# Altium PCB Siwa_PCB.PcbDoc (part 1 of 2)
Units mm, origin at the board's own origin, x right, y up, seen from the top; angles counter-clockwise.
Board outline 100 x 100 mm, 2 copper layers (Top Layer, Bottom Layer), stack 1.569 mm thick; 68 components, 95 nets, 317 pads, 64 vias.
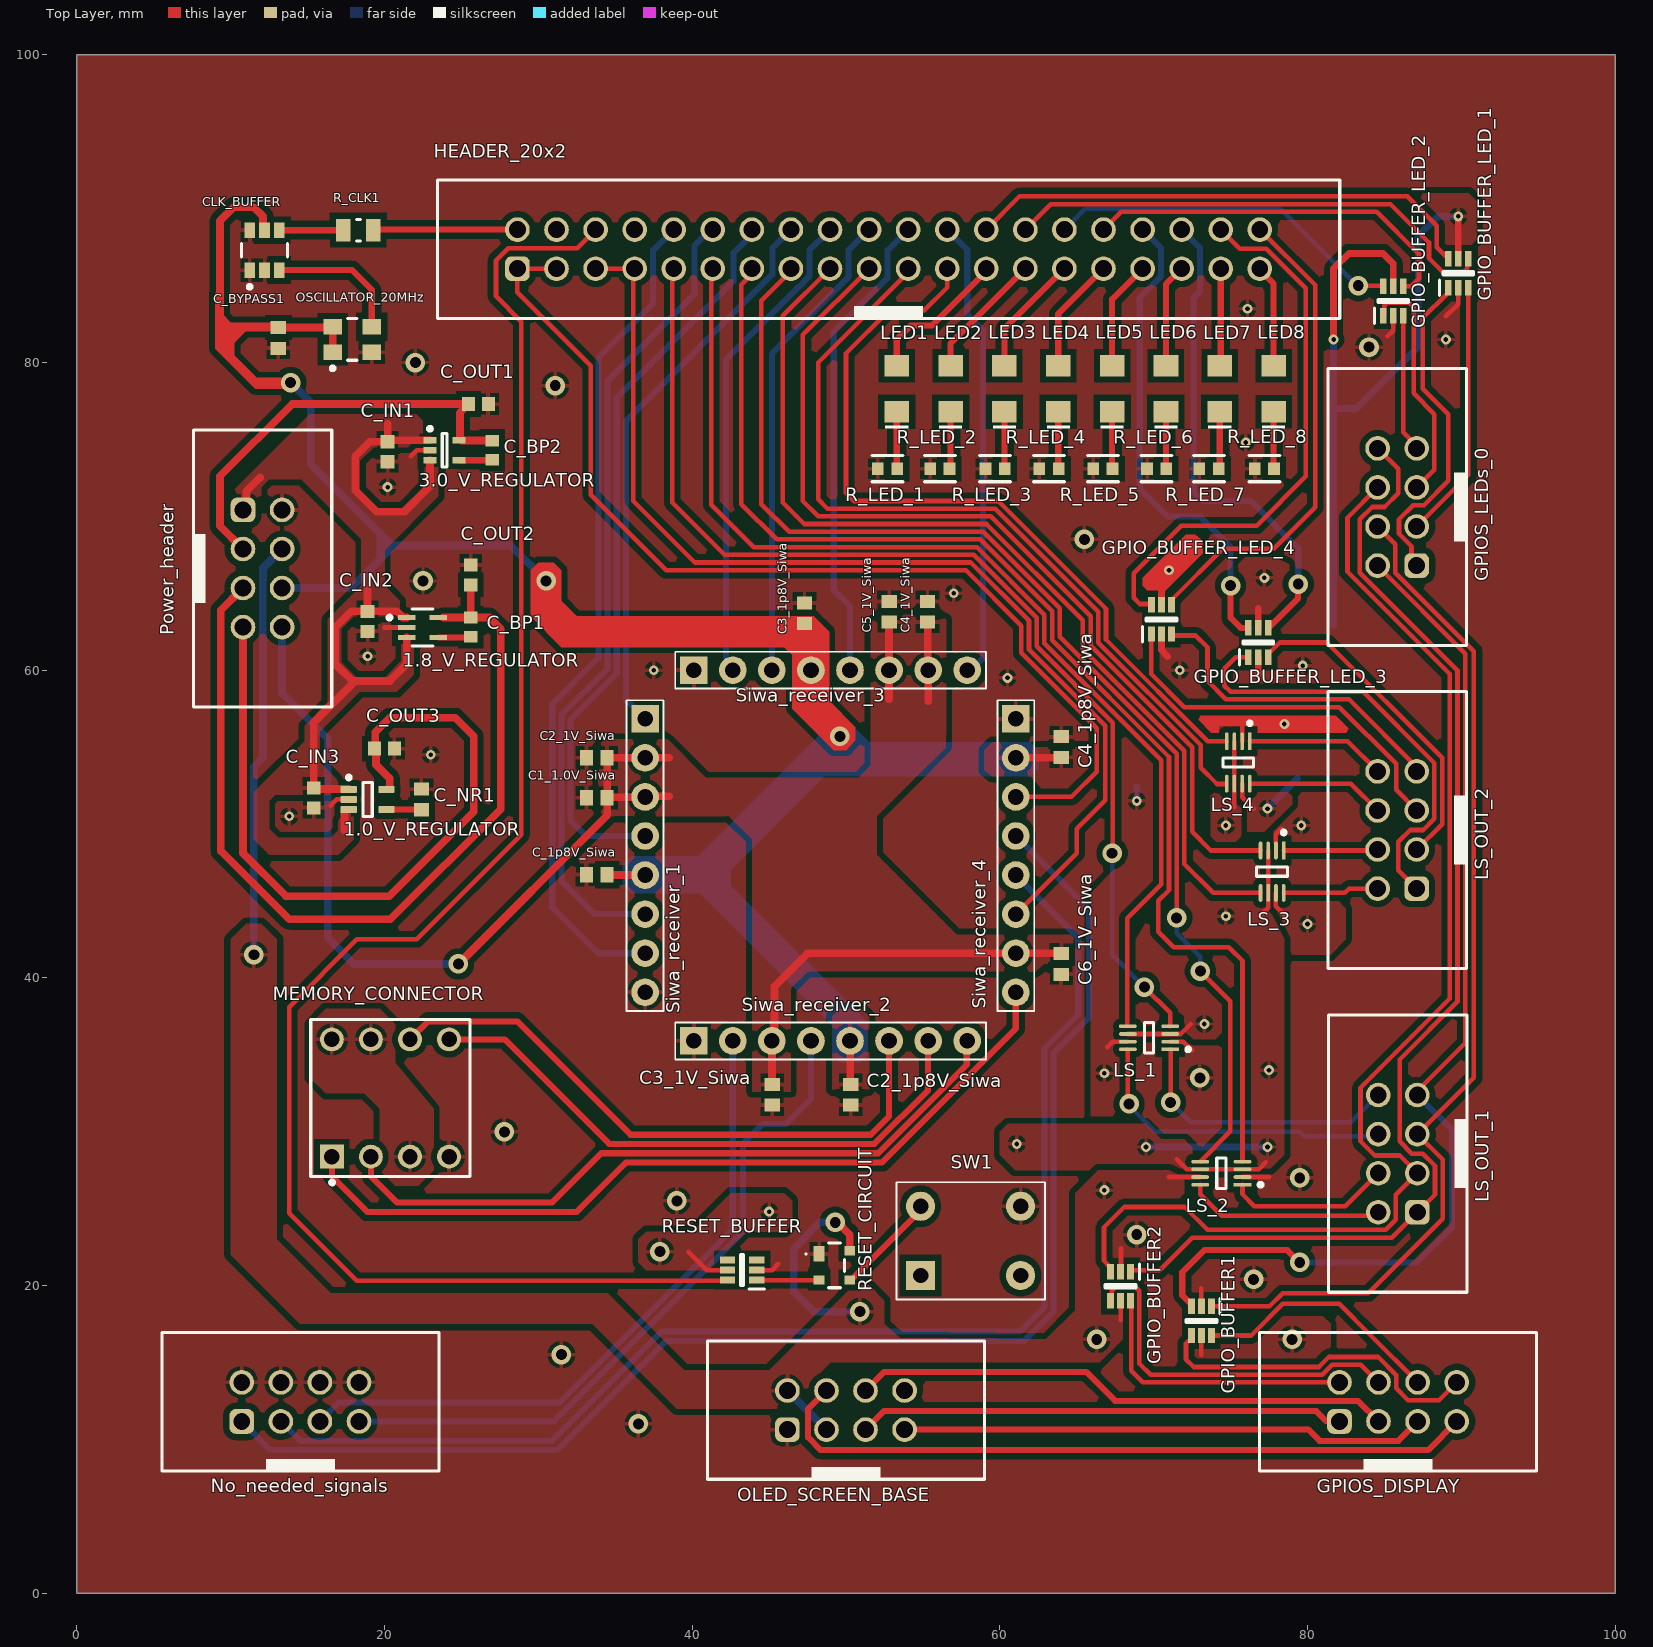
[diagram p0: Top Layer view]
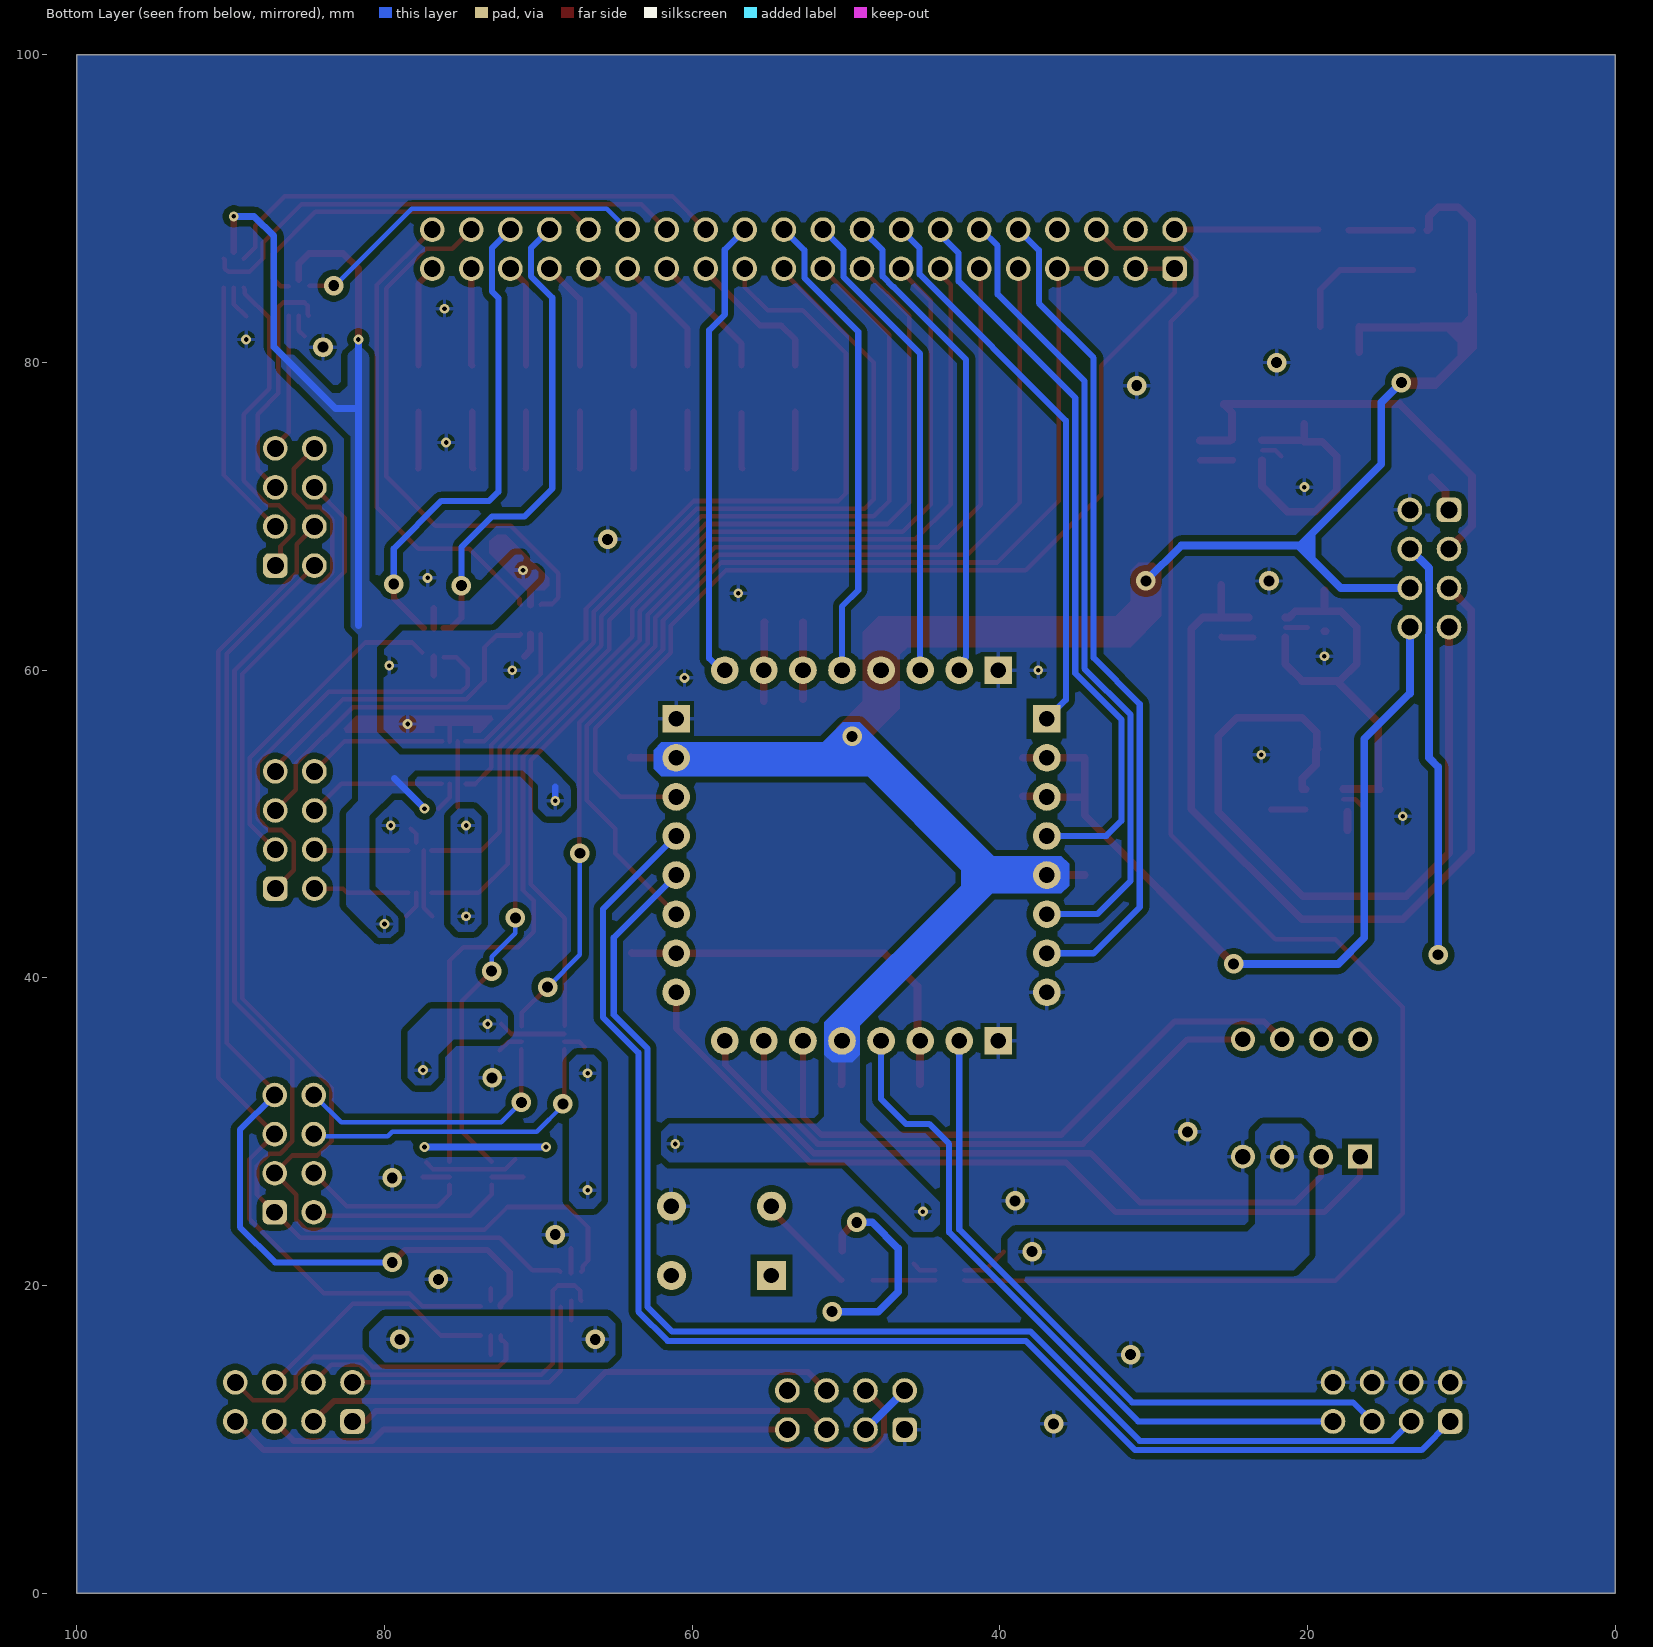
[diagram p1: Bottom Layer view, seen from below]
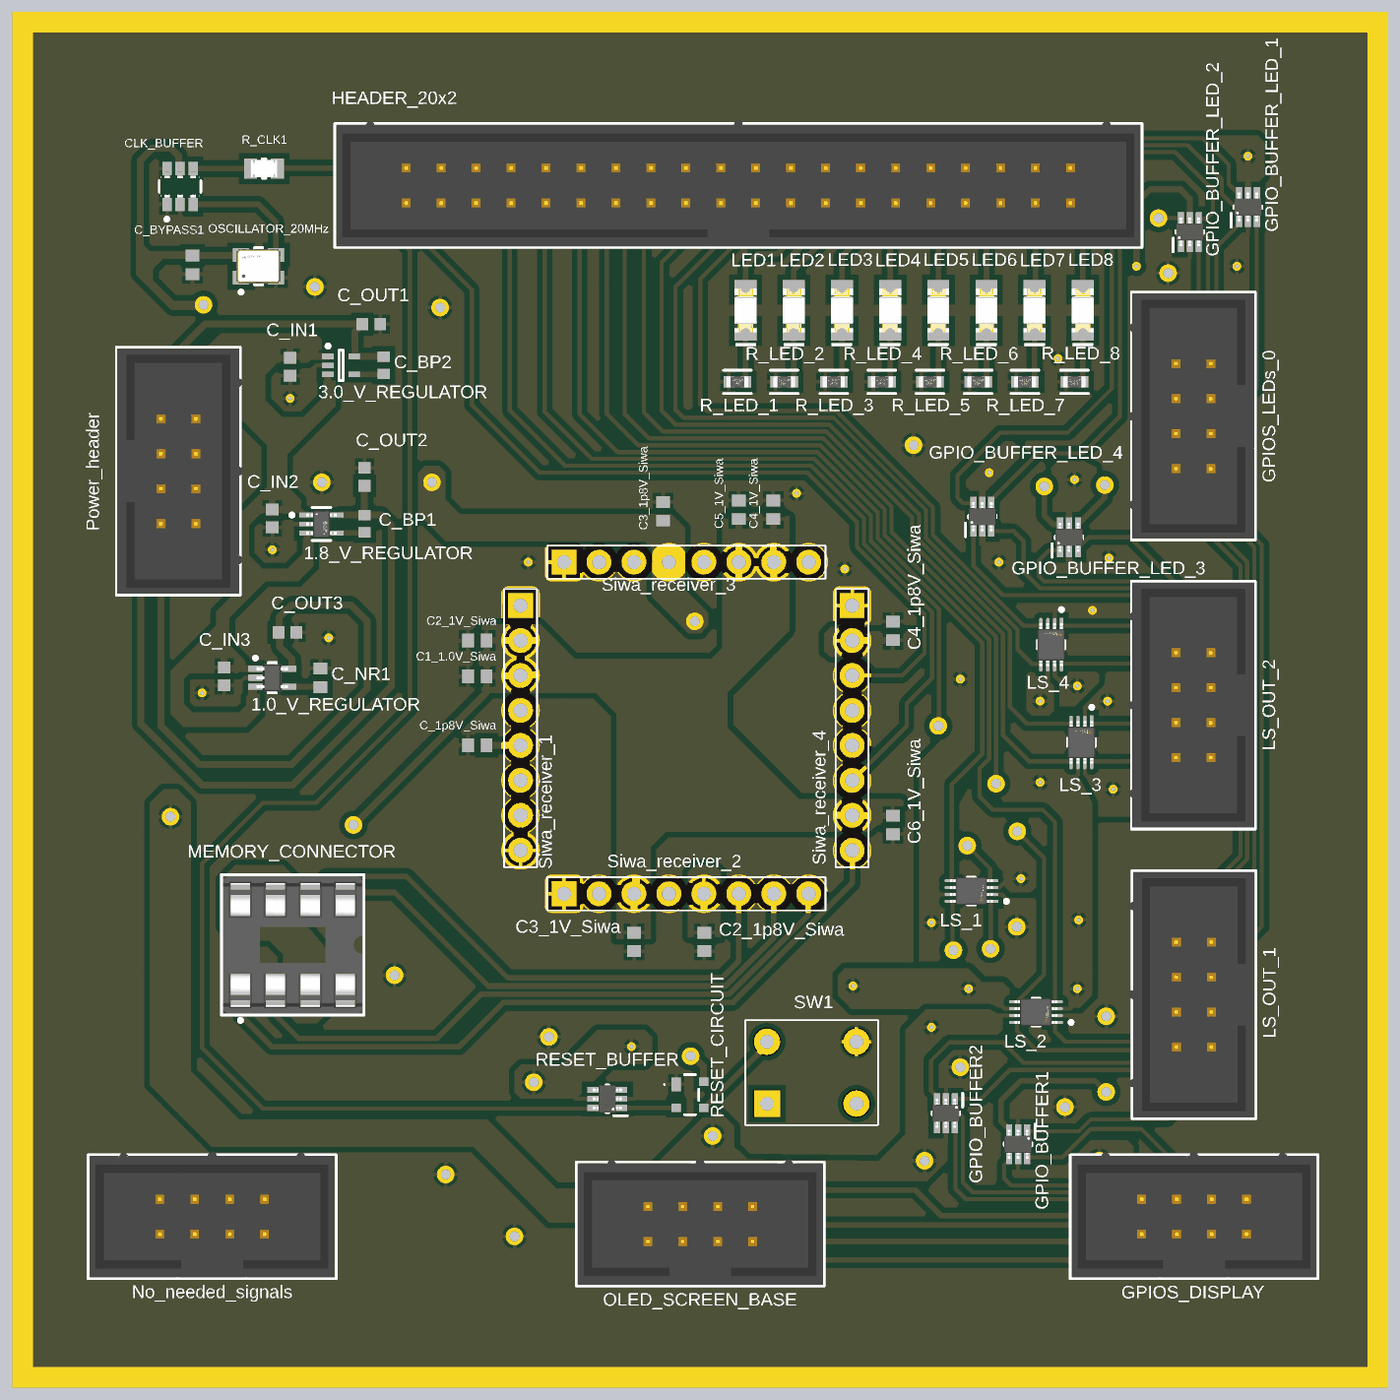
[diagram p3: 3D render of the assembled board from above, using the file's embedded part models]

## Layer stack, top to bottom
Top Solder: solder mask 0.0254, SM-001, Dk 4
Top Layer: signal copper 0.035
Dielectric 1: core 1.4986, Core-043, Dk 4.3
Bottom Layer: signal copper 0.035
Bottom Solder: solder mask 0.0254, SM-001, Dk 4

## Board outline
0,0 100,0 100,100 0,100

## Design rules (kind name [scope] priority, off if disabled: settings)
AssemblyTestPointUsage [All] p1: isadvanced=TRUE
AssemblyTestpoint [All] p1: isadvanced=TRUE testpointundercomponent=TRUE minsize=1.016 maxsize=2.54 preferedsize=1.524 minholesize=0 maxholesize=1.016 preferedholesize=0.813 testpointgrid=0.025 usegrid=TRUE gridtolerance=0 allowsidetop=TRUE allowsidebottom=TRUE
Clearance Clearance_1 [InNetClass('Power') And OnMid vs OnMid] p1: gap=0.4 ignorepadtopadclearanceinfootprint=TRUE except(0.2: Arc-SMDPad Arc-THPad Track-SMDPad Track-THPad SMDPad-SMDPad SMDPad-THPad SMDPad-Text THPad-THPad THPad-Text) sourcerule=100 cellrowname=Power cellrowtype=2 cellcolname=All cellcoltype=0 innerlayers=TRUE
Clearance Clearance_2 [InNetClass('Power') And (ExistsOnLayer('Top Layer') Or ExistsOnLayer('Bottom Layer')) vs (ExistsOnLayer('Top Layer') Or ExistsOnLayer('Bottom Layer'))] p2: gap=0.4 ignorepadtopadclearanceinfootprint=TRUE except(0.2: Arc-SMDPad Arc-THPad Track-SMDPad Track-THPad SMDPad-SMDPad SMDPad-THPad SMDPad-Text THPad-THPad THPad-Text) sourcerule=100 cellrowname=Power cellrowtype=2 cellcolname=All cellcoltype=0 outerlayers=TRUE
Clearance Clearance_3 [InNetClass('Power')] p3: gap=0.254 ignorepadtopadclearanceinfootprint=TRUE sourcerule=100 cellrowname=Power cellrowtype=2 cellcolname=All cellcoltype=0
Clearance Clearance_1 [OnMid vs InNet('1.8V') And OnMid] p4: gap=0.4 ignorepadtopadclearanceinfootprint=TRUE except(0.2: Arc-SMDPad Arc-THPad Track-SMDPad Track-THPad SMDPad-SMDPad SMDPad-THPad SMDPad-Text THPad-THPad THPad-Text) sourcerule=100 cellrowname=All cellrowtype=0 cellcolname=1.8V cellcoltype=1 innerlayers=TRUE
Clearance Clearance_2 [(ExistsOnLayer('Top Layer') Or ExistsOnLayer('Bottom Layer')) vs InNet('1.8V') And (ExistsOnLayer('Top Layer') Or ExistsOnLayer('Bottom Layer'))] p5: gap=0.4 ignorepadtopadclearanceinfootprint=TRUE except(0.2: Arc-SMDPad Arc-THPad Track-SMDPad Track-THPad SMDPad-SMDPad SMDPad-THPad SMDPad-Text THPad-THPad THPad-Text) sourcerule=100 cellrowname=All cellrowtype=0 cellcolname=1.8V cellcoltype=1 outerlayers=TRUE
Clearance Clearance_3 [ vs InNet('1.8V')] p6: gap=0.254 ignorepadtopadclearanceinfootprint=TRUE sourcerule=100 cellrowname=All cellrowtype=0 cellcolname=1.8V cellcoltype=1
Clearance Clearance_1 [OnMid vs InNet('1.8V_regulator') And OnMid] p7: gap=0.4 ignorepadtopadclearanceinfootprint=TRUE sourcerule=100 cellrowname=All cellrowtype=0 cellcolname=1.8V_regulator cellcoltype=1 innerlayers=TRUE
Clearance Clearance_2 [(ExistsOnLayer('Top Layer') Or ExistsOnLayer('Bottom Layer')) vs InNet('1.8V_regulator') And (ExistsOnLayer('Top Layer') Or ExistsOnLayer('Bottom Layer'))] p8: gap=0.4 ignorepadtopadclearanceinfootprint=TRUE sourcerule=100 cellrowname=All cellrowtype=0 cellcolname=1.8V_regulator cellcoltype=1 outerlayers=TRUE
Clearance Clearance_3 [ vs InNet('1.8V_regulator')] p9: gap=0.254 ignorepadtopadclearanceinfootprint=TRUE sourcerule=100 cellrowname=All cellrowtype=0 cellcolname=1.8V_regulator cellcoltype=1
Clearance Clearance_1 [OnMid vs InNet('1V') And OnMid] p10: gap=0.4 ignorepadtopadclearanceinfootprint=TRUE except(0.2: Arc-SMDPad Arc-THPad Track-SMDPad Track-THPad SMDPad-SMDPad SMDPad-THPad SMDPad-Text THPad-THPad THPad-Text) sourcerule=100 cellrowname=All cellrowtype=0 cellcolname=1V cellcoltype=1 innerlayers=TRUE
Clearance Clearance_2 [(ExistsOnLayer('Top Layer') Or ExistsOnLayer('Bottom Layer')) vs InNet('1V') And (ExistsOnLayer('Top Layer') Or ExistsOnLayer('Bottom Layer'))] p11: gap=0.4 ignorepadtopadclearanceinfootprint=TRUE except(0.2: Arc-SMDPad Arc-THPad Track-SMDPad Track-THPad SMDPad-SMDPad SMDPad-THPad SMDPad-Text THPad-THPad THPad-Text) sourcerule=100 cellrowname=All cellrowtype=0 cellcolname=1V cellcoltype=1 outerlayers=TRUE
Clearance Clearance_3 [ vs InNet('1V')] p12: gap=0.254 ignorepadtopadclearanceinfootprint=TRUE sourcerule=100 cellrowname=All cellrowtype=0 cellcolname=1V cellcoltype=1
Clearance Clearance_1 [OnMid vs InNet('1V_regulator') And OnMid] p13: gap=0.4 ignorepadtopadclearanceinfootprint=TRUE except(0.2: Arc-SMDPad Arc-THPad Track-SMDPad Track-THPad SMDPad-SMDPad SMDPad-THPad SMDPad-Text THPad-THPad THPad-Text) sourcerule=100 cellrowname=All cellrowtype=0 cellcolname=1V_regulator cellcoltype=1 innerlayers=TRUE
Clearance Clearance_2 [(ExistsOnLayer('Top Layer') Or ExistsOnLayer('Bottom Layer')) vs InNet('1V_regulator') And (ExistsOnLayer('Top Layer') Or ExistsOnLayer('Bottom Layer'))] p14: gap=0.4 ignorepadtopadclearanceinfootprint=TRUE except(0.2: Arc-SMDPad Arc-THPad Track-SMDPad Track-THPad SMDPad-SMDPad SMDPad-THPad SMDPad-Text THPad-THPad THPad-Text) sourcerule=100 cellrowname=All cellrowtype=0 cellcolname=1V_regulator cellcoltype=1 outerlayers=TRUE
Clearance Clearance_3 [ vs InNet('1V_regulator')] p15: gap=0.254 ignorepadtopadclearanceinfootprint=TRUE sourcerule=100 cellrowname=All cellrowtype=0 cellcolname=1V_regulator cellcoltype=1
Clearance Clearance_1 [OnMid vs InNet('3V') And OnMid] p16: gap=0.4 ignorepadtopadclearanceinfootprint=TRUE except(0.2: Arc-SMDPad Arc-THPad Track-SMDPad Track-THPad SMDPad-SMDPad SMDPad-THPad SMDPad-Text THPad-THPad THPad-Text) sourcerule=100 cellrowname=All cellrowtype=0 cellcolname=3V cellcoltype=1 innerlayers=TRUE
Clearance Clearance_2 [(ExistsOnLayer('Top Layer') Or ExistsOnLayer('Bottom Layer')) vs InNet('3V') And (ExistsOnLayer('Top Layer') Or ExistsOnLayer('Bottom Layer'))] p17: gap=0.4 ignorepadtopadclearanceinfootprint=TRUE except(0.2: Arc-SMDPad Arc-THPad Track-SMDPad Track-THPad SMDPad-SMDPad SMDPad-THPad SMDPad-Text THPad-THPad THPad-Text) sourcerule=100 cellrowname=All cellrowtype=0 cellcolname=3V cellcoltype=1 outerlayers=TRUE
Clearance Clearance_3 [ vs InNet('3V')] p18: gap=0.254 ignorepadtopadclearanceinfootprint=TRUE sourcerule=100 cellrowname=All cellrowtype=0 cellcolname=3V cellcoltype=1
Clearance Clearance_1 [OnMid vs InNet('3V_regulator') And OnMid] p19: gap=0.4 ignorepadtopadclearanceinfootprint=TRUE sourcerule=100 cellrowname=All cellrowtype=0 cellcolname=3V_regulator cellcoltype=1 innerlayers=TRUE
Clearance Clearance_2 [(ExistsOnLayer('Top Layer') Or ExistsOnLayer('Bottom Layer')) vs InNet('3V_regulator') And (ExistsOnLayer('Top Layer') Or ExistsOnLayer('Bottom Layer'))] p20: gap=0.4 ignorepadtopadclearanceinfootprint=TRUE sourcerule=100 cellrowname=All cellrowtype=0 cellcolname=3V_regulator cellcoltype=1 outerlayers=TRUE
Clearance Clearance_3 [ vs InNet('3V_regulator')] p21: gap=0.254 ignorepadtopadclearanceinfootprint=TRUE sourcerule=100 cellrowname=All cellrowtype=0 cellcolname=3V_regulator cellcoltype=1
Clearance Clearance_1 [OnMid vs InNet('5V_input') And OnMid] p22: gap=0.4 ignorepadtopadclearanceinfootprint=TRUE except(0.2: Arc-SMDPad Arc-THPad Track-SMDPad Track-THPad SMDPad-SMDPad SMDPad-THPad SMDPad-Text THPad-THPad THPad-Text) sourcerule=100 cellrowname=All cellrowtype=0 cellcolname=5V_input cellcoltype=1 innerlayers=TRUE
Clearance Clearance_2 [(ExistsOnLayer('Top Layer') Or ExistsOnLayer('Bottom Layer')) vs InNet('5V_input') And (ExistsOnLayer('Top Layer') Or ExistsOnLayer('Bottom Layer'))] p23: gap=0.4 ignorepadtopadclearanceinfootprint=TRUE except(0.2: Arc-SMDPad Arc-THPad Track-SMDPad Track-THPad SMDPad-SMDPad SMDPad-THPad SMDPad-Text THPad-THPad THPad-Text) sourcerule=100 cellrowname=All cellrowtype=0 cellcolname=5V_input cellcoltype=1 outerlayers=TRUE
Clearance Clearance_3 [ vs InNet('5V_input')] p24: gap=0.254 ignorepadtopadclearanceinfootprint=TRUE sourcerule=100 cellrowname=All cellrowtype=0 cellcolname=5V_input cellcoltype=1
Clearance Clearance_1 [InNet('GND') And OnMid vs OnMid] p25: gap=0.4 ignorepadtopadclearanceinfootprint=TRUE except(0.2: Arc-SMDPad Arc-THPad Track-SMDPad Track-THPad SMDPad-SMDPad SMDPad-THPad SMDPad-Text THPad-THPad THPad-Text) sourcerule=100 cellrowname=GND cellrowtype=1 cellcolname=All cellcoltype=0 innerlayers=TRUE
Clearance Clearance_2 [InNet('GND') And (ExistsOnLayer('Top Layer') Or ExistsOnLayer('Bottom Layer')) vs (ExistsOnLayer('Top Layer') Or ExistsOnLayer('Bottom Layer'))] p26: gap=0.4 ignorepadtopadclearanceinfootprint=TRUE except(0.2: Arc-SMDPad Arc-THPad Track-SMDPad Track-THPad SMDPad-SMDPad SMDPad-THPad SMDPad-Text THPad-THPad THPad-Text) sourcerule=100 cellrowname=GND cellrowtype=1 cellcolname=All cellcoltype=0 outerlayers=TRUE
Clearance Clearance_3 [InNet('GND')] p27: gap=0.254 ignorepadtopadclearanceinfootprint=TRUE sourcerule=100 cellrowname=GND cellrowtype=1 cellcolname=All cellcoltype=0
Clearance Clearance_1 [OnMid vs OnMid] p28: gap=0.2 ignorepadtopadclearanceinfootprint=TRUE sourcerule=100 cellrowname=All cellrowtype=0 cellcolname=All cellcoltype=0 innerlayers=TRUE
Clearance Clearance_2 [(ExistsOnLayer('Top Layer') Or ExistsOnLayer('Bottom Layer')) vs (ExistsOnLayer('Top Layer') Or ExistsOnLayer('Bottom Layer'))] p29: gap=0.2 ignorepadtopadclearanceinfootprint=TRUE sourcerule=100 cellrowname=All cellrowtype=0 cellcolname=All cellcoltype=0 outerlayers=TRUE
Clearance [All] p30: gap=0.254 ignorepadtopadclearanceinfootprint=TRUE ismatrix=TRUE miname0=1.8V mitype0=1 miname1=5V_input mitype1=1 miname2=1.8V_regulator mitype2=1 miname3=3V_regulator mitype3=1 miname4=Power mitype4=2 miname5=1V mitype5=1 miname6=3V mitype6=1 miname7=1V_regulator mitype7=1 miname8=GND mitype8=1
ComponentClearance [All] p1: isadvanced=TRUE gap=0.254 collisioncheckmode=3 verticalgap=0.254 showdistances=FALSE
FabricationTestPointUsage [All] p1: isadvanced=TRUE valid=0 allowmultiple=FALSE
FabricationTestpoint [All] p1: isadvanced=TRUE side=3 testpointundercomponent=TRUE minsize=1.016 maxsize=2.54 preferedsize=1.524 minholesize=0 maxholesize=1.016 preferedholesize=0.813 testpointgrid=0.025 allowsidetop=TRUE allowsidebottom=TRUE usegrid=TRUE gridtolerance=0
FanoutControl Fanout_BGA [IsBGA] p1: isadvanced=TRUE bgadir=Out bgaviamode=Centered fanoutstyle=Auto fanoutdirection=Alternating viagrid=0.025 // Fanout_BGA (Default Rule)
FanoutControl Fanout_LCC [IsLCC] p2: isadvanced=TRUE bgadir=Out bgaviamode=Centered fanoutstyle=Auto fanoutdirection=Alternating viagrid=0.025 // Fanout_LCC (Default Rule)
FanoutControl Fanout_SOIC [IsSOIC] p3: isadvanced=TRUE bgadir=Out bgaviamode=Centered fanoutstyle=Auto fanoutdirection=Alternating viagrid=0.025 // Fanout_SOIC (Default Rule)
FanoutControl Fanout_Small [(CompPinCount < 5)] p4: isadvanced=TRUE bgadir=Out bgaviamode=Centered fanoutstyle=Auto fanoutdirection=OutThenIn viagrid=0.025 // Fanout_Small (Default Rule)
FanoutControl Fanout_Default [All] p5: isadvanced=TRUE bgadir=Out bgaviamode=Centered fanoutstyle=Auto fanoutdirection=Alternating viagrid=0.025 // Fanout_Default (Default Rule)
Height [All] p1: isadvanced=TRUE minheight=0 maxheight=25.4 prefheight=12.7
HoleSize [All] p1: isadvanced=TRUE absolutevalues=TRUE maxlimit=2.54 minlimit=0.025 maxpercent=80.000 minpercent=20.000
HoleToHoleClearance [All] p1: isadvanced=TRUE gap=0.254 allowstackedmicrovias=TRUE
LayerPairs [All] p1: isadvanced=TRUE enforce=TRUE
MinimumSolderMaskSliver [All] p1: isadvanced=TRUE minsoldermaskwidth=0.254
NetAntennae [All] p1: isadvanced=TRUE netantennaetolerance=0
PasteMaskExpansion [All] p1: isadvanced=TRUE expansion=0
PlaneClearance [All] p1: isadvanced=TRUE clearance=0.4
PlaneConnect [All] p1: isadvanced=TRUE planeconnectstyle=Relief reliefexpansion=0.508 reliefentries=4 reliefconductorwidth=0.254 reliefairgap=0.254
PolygonConnect [All] p1: connectstyle=Relief reliefconductorwidth=0.254 reliefentries=4 polygonreliefangle="90 Angle" airgapwidth=0.254
RoutingCorners [All] p1: isadvanced=TRUE cornerstyle=45-Degree minsetback=2.54 maxsetback=2.54
RoutingPriority [All] p1: isadvanced=TRUE routingpriority=0
RoutingVias [All] p1: holewidth=0.6 width=1 viastyle="Through Hole" minholewidth=0.6 minwidth=1 maxholewidth=0.6 maxwidth=1
ShortCircuit [All] p1: isadvanced=TRUE allowed=FALSE
SilkToSilkClearance [All] p1: isadvanced=TRUE silktosilkclearance=0.254
SilkToSolderMaskClearance [IsPad] p1: isadvanced=TRUE minsilkscreentomaskgap=0.254 clearancetoexposedcopper=TRUE
SolderMaskExpansion [All] p1: isadvanced=TRUE expansion=0 istentingtop=FALSE
SupplyNets "Schematic Supply Nets_35" [InNet('GPIO_LED_3')] p1: isadvanced=TRUE voltage=0.000
SupplyNets "Schematic Supply Nets_34" [InNet('GPIO_PAD_1')] p2: isadvanced=TRUE voltage=0.000
SupplyNets "Schematic Supply Nets_33" [InNet('GPIO_PAD_5_OUT')] p3: isadvanced=TRUE voltage=0.000
SupplyNets "Schematic Supply Nets_32" [InNet('GND')] p4: isadvanced=TRUE voltage=0.000
SupplyNets "Schematic Supply Nets_31" [InNet('GPIO_LED_6')] p5: isadvanced=TRUE voltage=0.000
SupplyNets "Schematic Supply Nets_30" [InNet('GPIO_PAD_1_OUT')] p6: isadvanced=TRUE voltage=0.000
SupplyNets "Schematic Supply Nets_29" [InNet('1V')] p7: isadvanced=TRUE voltage=0.000
SupplyNets "Schematic Supply Nets_28" [InNet('GPIO_PAD_7_OUT')] p8: isadvanced=TRUE voltage=0.000
SupplyNets "Schematic Supply Nets_27" [InNet('GPIO_LED_1')] p9: isadvanced=TRUE voltage=0.000
SupplyNets "Schematic Supply Nets_26" [InNet('GPIO_PAD_2')] p10: isadvanced=TRUE voltage=0.000
SupplyNets "Schematic Supply Nets_25" [InNet('GPIO_PAD_3')] p11: isadvanced=TRUE voltage=0.000
SupplyNets "Schematic Supply Nets_24" [InNet('GPIO_PAD_4')] p12: isadvanced=TRUE voltage=0.000
SupplyNets "Schematic Supply Nets_23" [InNet('H_LED_4')] p13: isadvanced=TRUE voltage=0.000
SupplyNets "Schematic Supply Nets_22" [InNet('UART_RX')] p14: isadvanced=TRUE voltage=0.000
SupplyNets "Schematic Supply Nets_21" [InNet('GPIO_LED_4')] p15: isadvanced=TRUE voltage=0.000
SupplyNets "Schematic Supply Nets_20" [InNet('GPIO_LED_2')] p16: isadvanced=TRUE voltage=0.000
SupplyNets "Schematic Supply Nets_19" [InNet('GPIO_PAD_2_OUT')] p17: isadvanced=TRUE voltage=0.000
SupplyNets "Schematic Supply Nets_18" [InNet('GPIO_PAD_0')] p18: isadvanced=TRUE voltage=0.000
SupplyNets "Schematic Supply Nets_17" [InNet('H_LED_5')] p19: isadvanced=TRUE voltage=0.000
SupplyNets "Schematic Supply Nets_16" [InNet('H_LED_7')] p20: isadvanced=TRUE voltage=0.000
SupplyNets "Schematic Supply Nets_15" [InNet('3V')] p21: isadvanced=TRUE voltage=0.000
SupplyNets "Schematic Supply Nets_14" [InNet('GPIO_PAD_6')] p22: isadvanced=TRUE voltage=0.000
SupplyNets "Schematic Supply Nets_13" [InNet('GPIO_LED_7')] p23: isadvanced=TRUE voltage=0.000
SupplyNets "Schematic Supply Nets_12" [InNet('GPIO_PAD_5')] p24: isadvanced=TRUE voltage=0.000
SupplyNets "Schematic Supply Nets_11" [InNet('H_LED_6')] p25: isadvanced=TRUE voltage=0.000
SupplyNets "Schematic Supply Nets_10" [InNet('GPIO_LED_5')] p26: isadvanced=TRUE voltage=0.000
SupplyNets "Schematic Supply Nets_9" [InNet('GPIO_PAD_3_OUT')] p27: isadvanced=TRUE voltage=0.000
SupplyNets "Schematic Supply Nets_8" [InNet('GPIO_PAD_4_OUT')] p28: isadvanced=TRUE voltage=0.000
SupplyNets "Schematic Supply Nets_7" [InNet('POC_CONTROL')] p29: isadvanced=TRUE voltage=0.000
SupplyNets "Schematic Supply Nets_6" [InNet('GPIO_PAD_6_OUT')] p30: isadvanced=TRUE voltage=0.000
SupplyNets "Schematic Supply Nets_5" [InNet('UART_TX')] p31: isadvanced=TRUE voltage=0.000
SupplyNets "Schematic Supply Nets_4" [InNet('1.8V')] p32: isadvanced=TRUE voltage=0.000
SupplyNets "Schematic Supply Nets_3" [InNet('GPIO_PAD_0_OUT')] p33: isadvanced=TRUE voltage=0.000
SupplyNets "Schematic Supply Nets_2" [InNet('GPIO_LED_0')] p34: isadvanced=TRUE voltage=0.000
SupplyNets "Schematic Supply Nets_1" [InNet('GPIO_PAD_7')] p35: isadvanced=TRUE voltage=0.000
SupplyNets "Schematic Supply Nets" [InNet('MAIP')] p36: isadvanced=TRUE voltage=0.000
UnRoutedNet [All] p1: isadvanced=TRUE
UnpouredPolygon [All] p1: isadvanced=TRUE
Width "Schematic Width Constraint" [InNetClass('Power')] p1: maxlimit=0.5 minlimit=0.45 preferedwidth=0.5 minimp=50.000000 maximp=50.000000 favimp=50.000000
Width [All] p2: maxlimit=0.4 minlimit=0.3 preferedwidth=0.4 minimp=50.000000 maximp=50.000000 favimp=50.000000
4 further rules are at their usual default settings.

## Classes and differential pairs
net class Power: 1.8V 1.8V_regulator 1V 1V_regulator 3V 3V_regulator 5V_input GND

## Components (designator, comment, footprint, x,y, rotation, side; value= is the part's Value field where it differs from the comment)
1.0_V_REGULATOR "TPS71710DCKT" DCK0005A_M 18.9,51.6 r0 top
1.8_V_REGULATOR "MAX8510EXK18+T" FP-X5-1-MFG 22.474,62.772 r0 top
3.0_V_REGULATOR "MAX8510EXK30+T" X5-1_N 23.9,74.3 r0 top
C1_1.0V_Siwa "0.1uF" CAPC1608X92X38NL15T08 33.8,51.7 r0 top
C2_1p8V_Siwa "0.1uF" CAPC1608X92X38NL15T08 50.3,32.4 r90 top
C2_1V_Siwa "0.1uF" CAPC1608X92X38NL15T08 33.8,54.3 r0 top
C3_1p8V_Siwa "0.1uF" CAPC1608X92X38NL15T08 47.3,63.7 r270 top
C3_1V_Siwa "0.1uF" CAPC1608X92X38NL15T08 45.2,32.4 r90 top
C4_1p8V_Siwa "0.1uF" CAPC1608X92X38NL15T08 64,55 r90 top
C4_1V_Siwa "0.1uF" CAPC1608X92X38NL15T08 55.3,63.8 r270 top
C5_1V_Siwa "0.1uF" CAPC1608X92X38NL15T08 52.8,63.8 r270 top
C6_1V_Siwa "0.1uF" CAPC1608X92X38NL15T08 64,40.9 r90 top
C_1p8V_Siwa "0.1uF" CAPC1608X92X38NL15T08 33.8,46.7 r0 top
C_BP1 "10nF" CAPC1608X92X38LL15T08 25.6,62.8 r90 top
C_BP2 "10nF" CAPC1608X92X38LL15T08 27,74.3 r90 top
C_BYPASS1 "0.01uF" CAPC1608X92X38NL15T08 13.1,81.6 r90 top
C_IN1 "1 uF" CAPC1608X90X35LL15T15 20.2,74.2 r90 top
C_IN2 "1 uF" CAPC1608X90X35LL15T15 18.898,63.176 r90 top
C_IN3 "1 uF" CAPC1608X90X35LL15T15 15.4,51.7 r90 top
C_NR1 "0.1uF" CAPC1608X92X38NL15T08 22.4,51.6 r270 top
C_OUT1 "1 uF" CAPC1608X90X35LL15T15 26.1,77.3 r180 top
C_OUT2 "1 uF" CAPC1608X90X35LL15T15 25.6,66.2 r270 top
C_OUT3 "1 uF" CAPC1608X90X35LL15T15 20,54.9 r180 top
CLK_BUFFER "PL133-37TI" FP-SOT23-6LD-PL-1-MFG 12.2,87.3 r90 top
GPIO_BUFFER1 "74LVC2G17GW_125" SOT65P210X110-6N 73.1,17.7 r270 top
GPIO_BUFFER2 "74LVC2G17GW_125" SOT65P210X110-6N 67.85,19.95 r270 top
GPIO_BUFFER_LED_1 "74LVC2G17GW_125" SOT65P210X110-6N 89.8,85.8 r90 top
GPIO_BUFFER_LED_2 "74LVC2G17GW_125" SOT65P210X110-6N 85.575,84 r90 top
GPIO_BUFFER_LED_3 "74LVC2G17GW_125" SOT65P210X110-6N 76.8,61.8 r90 top
GPIO_BUFFER_LED_4 "74LVC2G17GW_125" SOT65P210X110-6N 70.5,63.3 r90 top
GPIOS_DISPLAY "61200821621" 61200821621 85.89,12.43 r0 top
GPIOS_LEDs_0 "61200821621" 61200821621 85.83,70.61 r90 top
HEADER_20x2 "61204021621" 61204021621 52.77,87.37 r0 top
LED1 "150120BS75000" WL-SMCW_1206_150120xx75000 53.3,78.3 r90 top
LED2 "150120BS75000" WL-SMCW_1206_150120xx75000 56.8,78.3 r90 top
LED3 "150120BS75000" WL-SMCW_1206_150120xx75000 60.3,78.3 r90 top
LED4 "150120BS75000" WL-SMCW_1206_150120xx75000 63.8,78.3 r90 top
LED5 "150120BS75000" WL-SMCW_1206_150120xx75000 67.3,78.3 r90 top
LED6 "150120BS75000" WL-SMCW_1206_150120xx75000 70.8,78.3 r90 top
LED7 "150120BS75000" WL-SMCW_1206_150120xx75000 74.3,78.3 r90 top
LED8 "150120BS75000" WL-SMCW_1206_150120xx75000 77.8,78.3 r90 top
LS_1 "TCA9406DCUR" FP-DCU0008A-IPC_B 69.7,36.1 r180 top
LS_2 "TCA9406DCUR" FP-DCU0008A-IPC_B 74.4,27.3 r180 top
LS_3 "TCA9406DCUR" FP-DCU0008A-IPC_B 77.7,46.9 r270 top
LS_4 "TCA9406DCUR" FP-DCU0008A-IPC_B 75.5,54 r270 top
LS_OUT_1 "61200821621" 61200821621 85.87,28.57 r90 top
LS_OUT_2 "61200821621" 61200821621 85.83,49.61 r90 top
MEMORY_CONNECTOR "DIP8_base" FP-1-2199298-2-MFG 20.385,32.185 r0 top
No_needed_signals "61200821621" 61200821621 14.53,12.43 r0 top
OLED_SCREEN_BASE "61200821621" 61200821621 50,11.9 r0 top
OSCILLATOR_20MHz "ASE3-20.000MHZ-KT" FP-ASE3-MFG 17.9,81.5 r0 top
Power_header "61200821621" 61200821621 12.07,66.61 r270 top
R_CLK1 "50Ω" FP-D12-CRCW0805-MFG 18.3,88.6 r0 top
R_LED_1 "CRGCQ0603J330R" FP-CRGCQ0603-IPC_C 52.7,73.1 r180 top value=330Ω
R_LED_2 "CRGCQ0603J330R" FP-CRGCQ0603-IPC_C 56.1,73.1 r180 top value=330Ω
R_LED_3 "CRGCQ0603J330R" FP-CRGCQ0603-IPC_C 59.7,73.1 r180 top value=330Ω
R_LED_4 "CRGCQ0603J330R" FP-CRGCQ0603-IPC_C 63.2,73.1 r180 top value=330Ω
R_LED_5 "CRGCQ0603J330R" FP-CRGCQ0603-IPC_C 66.7,73.1 r180 top value=330Ω
R_LED_6 "CRGCQ0603J330R" FP-CRGCQ0603-IPC_C 70.2,73.1 r180 top value=330Ω
R_LED_7 "CRGCQ0603J330R" FP-CRGCQ0603-IPC_C 73.6,73.1 r180 top value=330Ω
R_LED_8 "CRGCQ0603J330R" FP-CRGCQ0603-IPC_C 77.2,73.1 r180 top value=330Ω
RESET_BUFFER "74LVC2G17GW_125" SOT65P210X110-6N 43.25,21 r180 top
RESET_CIRCUIT "APX812-29UG-7" APX81229UG7 49.25,21.3 r270 top
Siwa_receiver_1 "HEADER 8P 2.54mm" PPTC081LFBN-RC 36.94,56.84 r0 top
Siwa_receiver_2 "HEADER 8P 2.54mm" PPTC081LFBN-RC 40.1,35.9 r90 top
Siwa_receiver_3 "HEADER 8P 2.54mm" PPTC081LFBN-RC 40.1,60 r90 top
Siwa_receiver_4 "HEADER 8P 2.54mm" PPTC081LFBN-RC 61.04,56.84 r0 top
SW1 "B3F-1000" PCBComponent_1 58.1,22.9 r0 top

## Footprints (in the part's own frame and the unit in brackets; to place one, negate y for a bottom-side part, rotate by r counter-clockwise, add the part's x,y. Pads: shape width x height; smd on the part's side, far side on the other; paste and mask are expansions set on the pad)
61200821621 [mm] "8 pins, straight, gold plating"
  rrect50% 1.6x1.6 hole 1.1: 1(-3.81,-1.27)
  round 1.6 hole 1.1: 2(-3.81,1.27) 3(-1.27,-1.27) 4(-1.27,1.27) 5(1.27,-1.27) 6(1.27,1.27) 7(3.81,-1.27) 8(3.81,1.27)
  silkscreen extent -9.01,-4.5 9.01,4.5, body extent -8.91,-4.42 8.91,4.75, height 9.13
61204021621 [mm] "40 pins, straight, gold plating"
  rrect50% 1.6x1.6 hole 1.1: 1(-24.13,-1.27)
  round 1.6 hole 1.1: 2(-24.13,1.27) 3(-21.59,-1.27) 4(-21.59,1.27) 5(-19.05,-1.27) 6(-19.05,1.27) 7(-16.51,-1.27) 8(-16.51,1.27) 9(-13.97,-1.27) 10(-13.97,1.27) 11(-11.43,-1.27) 12(-11.43,1.27) 13(-8.89,-1.27) 14(-8.89,1.27) 15(-6.35,-1.27) 16(-6.35,1.27) 17(-3.81,-1.27) 18(-3.81,1.27) 19(-1.27,-1.27) 20(-1.27,1.27) 21(1.27,-1.27) 22(1.27,1.27) 23(3.81,-1.27) 24(3.81,1.27) 25(6.35,-1.27) 26(6.35,1.27) 27(8.89,-1.27) 28(8.89,1.27) 29(11.43,-1.27) 30(11.43,1.27) 31(13.97,-1.27) 32(13.97,1.27) 33(16.51,-1.27) 34(16.51,1.27) 35(19.05,-1.27) 36(19.05,1.27) 37(21.59,-1.27) 38(21.59,1.27) 39(24.13,-1.27) 40(24.13,1.27)
  silkscreen extent -29.33,-4.5 29.33,4.5, body extent -29.23,-4.42 29.23,4.75, height 9.13
APX81229UG7 [mm]
  rect 1x0.7 smd: 1(-0.75,-1)
  rect 0.6x0.7 smd: 2(0.95,-1) 3(0.95,1) 4(-0.95,1)
  silkscreen extent -1.45,-1.9 1.45,0.65
CAPC1608X90X35LL15T15 [mm] "Chip Capacitor, 2-Leads, Body 1.60x0.81mm, IPC High Density"
  rect 0.85x0.9 smd: 1(-0.65,0) 2(0.65,0)
  body extent -0.88,-0.48 0.87,0.48, height 0.9
CAPC1608X92X38LL15T08 [mm] "Chip Capacitor, 2-Leads, Body 1.60x0.80mm, IPC High Density"
  rect 0.75x0.9 smd: 1(-0.625,0) 2(0.625,0)
  body extent -0.87,-0.48 0.87,0.48, height 0.92
CAPC1608X92X38NL15T08 [mm] "Chip Capacitor, 2-Leads, Body 1.60x0.80mm, IPC Medium Density"
  rect 0.85x1 smd: 1(-0.675,0) 2(0.675,0)
  body extent -0.87,-0.48 0.87,0.47, height 0.92
DCK0005A_M [mm] "SOT23, 5-Leads, Body 2.15x1.4mm, Pitch 0.65mm, IPC Low Density"
  rrect22% 1.05x0.45 smd: 1(-1.225,0.65) 2(-1.225,0) 3(-1.225,-0.65) 4(1.225,-0.65) 5(1.225,0.65)
  silkscreen extent -1.35,-1.1 0.3,1.55, body extent -1.14,-1 1.14,1, height 0.94
FP-1-2199298-2-MFG [mm]
  rect 1.55x1.55 hole 1 paste-2539.97 mask+0: 1(-3.81,-3.81)
  round 1.55 hole 1 paste-2539.97 mask+0: 2(-1.27,-3.81) 3(1.27,-3.81) 4(3.81,-3.81) 5(3.81,3.81) 6(1.27,3.81) 7(-1.27,3.81) 8(-3.81,3.81)
  silkscreen extent -5.18,-5.61 5.18,5.1, body extent -5.28,-5.2 5.28,5.2, height 0.25
FP-ASE3-MFG [mm]
  rect 1.2x1 smd paste+0 mask+0: 1(-1.27,-0.825) 2(1.27,-0.825) 3(1.27,0.825) 4(-1.27,0.825)
  silkscreen extent -1.39,-2 0.3,1.35, body extent -1.97,-1.45 1.97,1.45, height 0.25
FP-CRGCQ0603-IPC_C [mm]
  rect 0.758x0.812 smd paste+0 mask+0: 1(-0.627,0) 2(0.627,0)
  silkscreen extent -1.01,-0.85 1.01,0.85, body extent -1.11,-0.55 1.11,0.55, height 0.25
FP-D12-CRCW0805-MFG [mm]
  rect 0.95x1.45 smd paste+0 mask+0: 1(-0.975,0) 2(0.975,0)
  silkscreen extent -0.13,-0.7 0.13,0.7, body extent -1.55,-0.82 1.55,0.82, height 0.25
FP-DCU0008A-IPC_B [mm]
  rect 1.16x0.237 smd paste+0 mask+0: 1(-1.376,0.75)
  rrect100% 1.16x0.237 smd paste+0 mask+0: 2(-1.376,0.25) 3(-1.376,-0.25) 4(-1.376,-0.75) 5(1.376,-0.75) 6(1.376,-0.25) 7(1.376,0.25) 8(1.376,0.75)
  silkscreen extent -2.68,-1 0.3,1, body extent -2.21,-1.25 2.21,1.25, height 0.25
FP-SOT23-6LD-PL-1-MFG [mm]
  rect 0.99x0.69 smd: 1(-1.295,0.95) 2(-1.295,0) 3(-1.295,-0.95) 4(1.295,-0.95) 5(1.295,0) 6(1.295,0.95)
  silkscreen extent -2.5,-1.5 0.43,1.5, body extent -1.89,-1.6 1.89,1.6, height 0.25
FP-X5-1-MFG [mm]
  rect 1.15x0.35 smd paste+0 mask+0: 1(-1.025,0.65) 2(-1.025,0) 3(-1.025,-0.65) 4(1.025,-0.65) 5(1.025,0.65)
  silkscreen extent -2.27,-1.2 0.67,1.2, body extent -1.7,-1.2 1.7,1.2, height 0.25
PCBComponent_1 [mm]
  rect 1.9x1.9 hole 1 paste-2539.97 mask+0.102: 1(-3.25,-2.25)
  round 1.9 hole 1 paste-2539.97 mask+0.102: 2(-3.25,2.25) 3(3.25,-2.25) 4(3.25,2.25)
  silkscreen extent -4.83,-3.81 4.83,3.81
PPTC081LFBN-RC [mm]
  rect 1.8x1.8 hole 1.02 paste-2539.97 mask+0.5: 1(0,0)
  round 1.8 hole 1.02 paste-2539.97 mask+0.5: 2(0,-2.54) 3(0,-5.08) 4(0,-7.62) 5(0,-10.16) 6(0,-12.7) 7(0,-15.24) 8(0,-17.78)
  silkscreen extent -1.2,-19 1.2,1.2
SOT65P210X110-6N [mm]
  rect 1x0.45 smd: 1(-0.95,0.65) 2(-0.95,0) 3(-0.95,-0.65) 4(0.95,-0.65) 5(0.95,0) 6(0.95,0.65)
  silkscreen extent -1.45,-1 0.1,1.22, body extent -1.05,-1 1.05,1, height 1
WL-SMCW_1206_150120xx75000 [mm] "SMD Mono-color Chip LED, body 3.2x1.6mm"
  rect 1.4x1.6 smd: 1(-1.5,0) 2(1.5,0)
  silkscreen extent -2.6,-0.75 -2.4,0.75, body extent -1.6,-0.8 1.6,0.8, height 0.68
X5-1_N [mm] "SOT353, 5-Leads, Body 2x1.3mm, Pitch 0.65mm, Lead Span 2.1mm, IPC Medium Density"
  rect 0.85x0.4 smd: 1(-0.95,0.65) 2(-0.95,0) 3(-0.95,-0.65) 4(0.95,-0.65) 5(0.95,0.65)
  silkscreen extent -1.07,-1.1 0.15,1.52, body extent -0.67,-1.1 0.68,1.1, height 1.1

## Part data
1.0_V_REGULATOR: library part CMP-0394-00843-2, "Single Output High PSRR LDO, 150 mA, Fixed 1 V Output, 2.5 to 6.5 V Input, with Low IQ, 5-pin SC70 (DCK), -40 to 85 degC, Green (RoHS & no Sb/Br)", Manufacturer="Texas Instruments", Accuracy(%)=3, Code_JEDEC=MO-203, ComponentLink1Description="Manufacturer URL", ComponentLink1URL=http://www.ti.com/, ComponentLink2Description=Datasheet, ComponentLink2URL=http://www.ti.com/general/docs/lit/getliterature.tsp?genericPartNumber=TPS71710&fileType=pdf, ComponentLink3Description="Package Specification", ComponentLink3URL=http://www.ti.com/litv/pdf/mpds025f, DatasheetVersion=SBVS068G, Eco-Plan="Green (RoHS & no Sb/Br)", Fixed Output Options(V)=1, Iout(Max)(A)=0.15, Iq(Typ)(mA)=0.05, Mounting Technology="Surface Mount", PackageDescription="5-Pin Plastic Small-Outline, Body 2 x 1.25 mm, Pitch 0.65 mm", PackageReference=DCK0005A, PackageVersion=4093553-3/G, PartNumber=TPS71710DCKT, SubFamily="Single Channel LDO", Vdo(Typ)(mV)=170, Vin(Max)(V)=6.5, Vin(Min)(V)=2.5, Vout Adj(Max)(V)=1, Vout Adj(Min)(V)=1
1.8_V_REGULATOR: library part CMP-0246-00401-2, "IC REG LINEAR 1.8V 120MA SC70-5", Case/Package=SC, Input Bias Current=40uA, Max Input Voltage=6V, Max Operating Temperature=85°C, Max Output Current=120mA, Max Power Dissipation=247mW, Min Current Limit=130mA, Min Input Voltage=2V, Min Operating Temperature=-40°C, Nominal Output Voltage=1.8V, Package Quantity=2500, Power Supply Rejection Ratio (PSRR)=54dB, Quiescent Current=90uA, Reference Voltage=1.225V, Accuracy=2%, Lead Free="Lead Free", Mount="Surface Mount", Number of Outputs=1, Number of Pins=5, Number of Regulators=1, Output Configuration=Positive, Output Current=120mA, Output Type=Fixed, Output Voltage=1.8V, Packaging="Tape and Reel", Polarity=Positive, RoHS Compliant=Yes, Series=-
3.0_V_REGULATOR: library part CMP-0246-00522-1, "Ultra-Low-Noise, High PSRR, Low-Dropout, 120mA Linear Regulator, 3V Out, 5-Pin SC70, -40°C to +85°C", Code_JEDEC=MO-203, ComponentLink1Description="Manufacturer URL", ComponentLink1URL=http://www.maxim-ic.com, ComponentLink2Description=Datasheet, ComponentLink2URL=http://datasheets.maxim-ic.com/en/ds/MAX8510-MAX8512.pdf, ComponentLink3Description="Package Specification", ComponentLink3URL=http://pdfserv.maxim-ic.com/package_dwgs/21-0076.PDF, DatasheetVersion="Rev 4, Aug-2011", PackageDescription="5-Pin SC70 Transistor Package, 0.65 mm Pitch, 2.2 mm Lead Span", PackageReference=X5-1, PackageVersion="revE, 2006"
C1_1.0V_Siwa C2_1p8V_Siwa C2_1V_Siwa C3_1p8V_Siwa C3_1V_Siwa C4_1p8V_Siwa C4_1V_Siwa C5_1V_Siwa C6_1V_Siwa C_1p8V_Siwa C_NR1: library part CMP-2006-01166-1, Manufacturer=Vitramon, Part Number=VJ0603Y104KXXAP
C_BP1 C_BP2: library part CMP-2006-01201-1, Manufacturer=Vitramon, Part Number=VJ0603Y103JXXAC
C_BYPASS1: library part CMP-2006-01149-1, Manufacturer=Vitramon, Part Number=VJ0603Y103KXAAP
C_IN1 C_IN2 C_IN3 C_OUT1 C_OUT2 C_OUT3: library part CMP-2006-04542-1, Manufacturer="AVX Interconnect / Elco", Part Number=0603YG105ZAT2A
CLK_BUFFER: library part CMP-00252-66952958-1, "PL133-37TI LVCMOS Sine Wave PL133 SOT-23-6 R-PDSO-G6 clock driver 0.95mm 1.62V~3.63V 150MHz -40C~85C", Max Frequency=150MHz, Max Operating Temperature=85°C, Max Supply Voltage=3.63V, Min Operating Temperature=-40°C, Min Supply Voltage=1.62V, Height=1.45mm, Input=LVCMOS, Lead Free="Lead Free", Lifecycle Status=Production, Logic Function=Inverting, Mount="Surface Mount", Number of Circuits=1, Number of Elements=1, Number of Inputs=1, Number of Outputs=3, RoHS=Compliant, Schedule B="8542390000, 8542390000"
GPIO_BUFFER1 GPIO_BUFFER2 GPIO_BUFFER_LED_1 GPIO_BUFFER_LED_2 GPIO_BUFFER_LED_3 GPIO_BUFFER_LED_4 RESET_BUFFER: "NXP 74LVC2G17GW,125, Dual Non-Inverting Schmitt Trigger Single Ended Buffer, 1.65  5.5 V, 6-Pin SC-88", Arrow Part Number=74LVC2G17GW,125, Manufacturer_Name=Nexperia, Mouser Part Number=771-LVC2G17GW125, Arrow Price/Stock=https://www.arrow.com/en/products/74lvc2g17gw125/nexperia?utm_currency=USD&region=nac, Datasheet Link=https://assets.nexperia.com/documents/data-sheet/74LVC2G17.pdf, Geometry.Height=1.1mm, Manufacturer_Part_Number=74LVC2G17GW,125, Mouser Price/Stock=https://www.mouser.co.uk/ProductDetail/Nexperia/74LVC2G17GW125?qs=me8TqzrmIYUC6E0%2FnH98oA%3D%3D
GPIOS_DISPLAY GPIOS_LEDs_0 LS_OUT_1 LS_OUT_2 No_needed_signals OLED_SCREEN_BASE Power_header: library part CMP-1502-00006-3, "Wr-bhd; 2.54MM Pitch 8 Way 2 Row Shrouded Straight Pcb Header, Surface Mount", Color=Black, Contact Resistance=20mΩ, Current Rating=3A, Insulation Resistance=1GΩ, Max Operating Temperature=105°C, Min Operating Temperature=-40°C, Operating Supply Voltage=250V, Connector Type="Male Pin", Contact Material=Copper, Contact Plating=Gold, Gender=Male, Insulation Material=PBT, Lead Pitch=2.54mm, Length=17.82mm, Mount="Through Hole", Number of Contacts=8, Number of Pins=8, Number of Positions=8, Number of Rows=2, Orientation=Vertical, Pitch=2.54mm, RoHS=Compliant, Row Spacing=2.54mm, Termination=Solder
HEADER_20x2: library part CMP-1502-00015-4, "WR-BHD Straight Male, Box Header, Through Hole, 2 Rows, 40 Contacts, 2.54mm Pitch", Color=Black, Contact Resistance=20mΩ, Current Rating=3A, Insulation Resistance=1GΩ, Max Operating Temperature=105°C, Min Operating Temperature=-40°C, Operating Supply Voltage=250V, Connector Type="Male Pin", Contact Material=Gold, Contact Plating=Gold, Gender=Male, Height=9.25mm, Insulation Material=PBT, Lead Pitch=2.54mm, Length=58.46mm, Mount="Through Hole", Number of Contacts=40, Number of Pins=40, Number of Positions=40, Number of Rows=2, Orientation=Vertical, Pitch=2.54mm, REACH SVHC=Unknown, RoHS=Compliant, Row Spacing=2.54mm, Termination=Solder, Voltage Rating=250V
LED1 LED2 LED3 LED4 LED5 LED6 LED7 LED8: library part CMP-1426-00015-3, "WL-SMCW SMT Mono-Color Chip LED Waterclear", Case Code (Imperial)=1206, Case Code (Metric)=3216, Color=Blue, Forward Current=100mA, Forward Voltage=3.2V, Manufacturer Package Identifier=LED_1206, Max Operating Temperature=85°C, Max Reverse Voltage (DC)=5V, Min Operating Temperature=-40°C, Test Current=20mA, Case/Package=1206, Dominant Wavelength=470nm, Height=680µm, Length=3.2mm, Lens Style="Clear, Rectangular", Luminous Intensity=145mcd, Mount="Surface Mount", Packaging="Tape and Reel", Peak Wavelength=465nm, REACH SVHC=Unknown, RoHS=Compliant, Viewing Angle=140°, Wavelength=470nm, Width=1.6mm
LS_1 LS_2 LS_3 LS_4: library part CMP-0314-00417-3, "IC TRNSLTR BIDIRECTIONAL US8", Case/Package=VSSOP, High Level Output Current=-50mA, Low Level Output Current=50mA, Max Operating Temperature=85°C, Max Supply Voltage=5.5V, Min Operating Temperature=-40°C, Min Supply Voltage=1.65V, Package Quantity=1, Contact Plating=Gold, Data Rate=24Mbps, Height=0.8mm, Lead Free="Lead Free", Length=2.1mm, Logic Function=Translator, Number of Bits=2, Number of Channels=2, Number of Outputs=2, Number of Pins=8, Output Type=Voltage, Packaging="Tape and Reel", Propagation Delay=4.4ns, Radiation Hardening=No, REACH SVHC="No SVHC", Turn-On Delay Time=260ns, Weight=0.00067oz, Width=2.4mm
MEMORY_CONNECTOR: library part CMP-03370-000009-1, "CONN IC DIP SOCKET 8POS TIN", Color=Black, Contact Current Rating=1A, Contact Resistance=20mR, Flammability Rating="UL94 V-0", Insulation Resistance=1GR, Max Operating Temperature=105°C, Min Operating Temperature=-40°C, Package Quantity=60, Connector Type=Pin, Contact Finish - Mating=TIN, Contact Material=Bronze, Contact Plating=Tin, Contact Post Length=3inch, ELV=Compliant, Housing Material=PBT, Lead Free="Lead Free", Lead Pitch=2.54mm, Length=0.4inch, Mating Alignment="Yes (With)", Mount="Through Hole", Number of Contacts=8, Number of Positions=8, Number of Rows=2, Orientation=Straight, Packaging=Rail/Tube, Pitch=2.54mm, Radiation Hardening=No, RoHS Compliant=Yes, Row Spacing=0.3inch, Series="Diplomate DL", Termination="Through Hole"
OSCILLATOR_20MHz: library part CMP-27762-010045-1, "XTAL OSC XO 20.0000MHZ CMOS SMD", Case/Package=SMD/SMT, Frequency=20MHz, Frequency Stability=30ppm, Load Capacitance=15pF, Max Operating Temperature=70°C, Max Supply Current=4mA, Max Supply Voltage=1.89V, Min Operating Temperature=-10°C, Min Supply Voltage=1.71V, Operating Supply Voltage=1.8V, Package Quantity=1000, Depth=2.5mm, Height=0.049inch, Lead Free="Lead Free", Length=3.2mm, Mount="Surface Mount", Number of Pins=4, Packaging="Tape and Reel", Radiation Hardening=No, Series=ASE3, Termination=SMD/SMT, Width=0.098inch
R_CLK1: library part CMP-00030-21390498-1, "CRCW080550R0FKTA Res Thick Film 0805 50 Ohm 1% 0.125W(1/8W) ±100ppm/C Pad SMD Automotive T/R", Case Code (Imperial)=0805, Case Code (Metric)=2012, Max Operating Temperature=155°C, Min Operating Temperature=-55°C, Power Rating=125mW, Temperature Coefficient=100ppm/°C, Tolerance=1%, Voltage Rating=150V, Case/Package=0805, Composition="Thick Film", Contact Plating="Lead, Tin", Height=450µm, Lead Free="Contains Lead", Length=2mm, NexarPartId=21390498, Resistance=50Ω, RoHS=Non-Compliant, Weight=5.499807mg, Width=1.25mm
R_LED_1 R_LED_2 R_LED_3 R_LED_4 R_LED_5 R_LED_6 R_LED_7 R_LED_8: library part CMP-03211-002147-1, "CRGCQ 0603 330R 5%", Ambient Temperature Range High=+70°C, Manufacturer="TE Connectivity", Package=CRGCQ0603, Power Rating=0.1W, Resistance=330Ω, Temperature="-55°C to +155°C", Temperature Coefficient=±100ppm/°C, Temperature Range High=+155°C, Temperature Range Low=-55°C, Tolerance=0.05, Voltage Rating=75V, Category=Res, ComponentLink2Description=Datasheet, ComponentLink2URL=https://www.te.com/commerce/DocumentDelivery/DDEController?Action=showdoc&DocId=Data+Sheet%7F1773204-3%7F1%7Fpdf%7FEnglish%7FENG_DS_1773204-3_1.pdf%7F4-2176339-581, Composition="Thick Film", Device Class L1="Passive Components", Device Class L2=Resistors, Device Class L3="Chip SMD Resistors", Digikey Description="CRGCQ 0603 330R 5%", Height=0.55mm, Ipc Land Pattern Name=RESC16080X45, Lead Free=Yes, Manufacturer Part Number=CRGCQ0603J330R, Mouser Description="Res General Purpose Thick Film 0603 330 Ohm 5% 1/10W ±100ppm/°C Molded Paper T/R", Octopart=https://octopart.com/crgcq0603j330r-te+connectivity-91018118, RoHS=TRUE, Series=CRGCQ
RESET_CIRCUIT: "Supervisor Push-Pull, Totem Pole 1 Channel SOT-143 , 2.93V , 140ms , -40C ~ 85C (TA)", Manufacturer_Name="Diodes Incorporated", Mouser Part Number=621-APX812-29UG-7, Arrow Part Number=APX812-29UG-7, Arrow Price/Stock=https://www.arrow.com/en/products/apx812-29ug-7/diodes-incorporated, Datasheet Link=https://www.diodes.com//assets/Datasheets/APX811_812.pdf, Geometry.Height=1.1mm, Manufacturer_Part_Number=APX812-29UG-7, Mouser Price/Stock=https://www.mouser.co.uk/ProductDetail/Diodes-Incorporated/APX812-29UG-7?qs=uwE%252BXfKqZqTVBV%252BbZr8J2A%3D%3D
Siwa_receiver_1 Siwa_receiver_2 Siwa_receiver_3 Siwa_receiver_4: library part PPTC081LFBN-RC
SW1: library part B3F-1000S

## Via types
v1: diameter 0.635, hole 0.3, Top Layer to Bottom Layer, 29 vias
v2: diameter 1.27/1.27 (per signal layer), hole 0.711, Top Layer to Bottom Layer, 17 vias
v3: diameter 1.27, hole 0.711, Top Layer to Bottom Layer, 16 vias
v4: diameter 0.635/0.635 (per signal layer), hole 0.3, Top Layer to Bottom Layer, 2 vias

## Nets (pads, with @x,y where several pads share a name; then routed paths per layer and width w, separated by ;. In a path a pad name is that pad's centre, name@x,y a point inside that pad or via, vN(x,y) a via of type N, cw(c..) or ccw(c..) an arc to the next point about the centre after c; other vN are vias at no path point)
1.8V: C2_1p8V_Siwa.2 C3_1p8V_Siwa.2 C4_1p8V_Siwa.1 C_1p8V_Siwa.2 C_BYPASS1.2 CLK_BUFFER.5 LS_1.3 LS_1.6 LS_2.3 LS_2.6 LS_3.3 LS_3.6 LS_4.3 LS_4.6 MEMORY_CONNECTOR.3 MEMORY_CONNECTOR.7 MEMORY_CONNECTOR.8 OSCILLATOR_20MHz.1 OSCILLATOR_20MHz.4 Power_header.6 RESET_BUFFER.5 Siwa_receiver_1.5 Siwa_receiver_2.5 Siwa_receiver_3.4 Siwa_receiver_4.2 | length 98.1
  Top Layer w0.3: 39.749,22.2 40.949,21 RESET_BUFFER.5@42.3,21 ; LS_1.6@68.314,36.35 LS_1.6@68.324,36.35 LS_1.3@71.076,36.35 71.75,36.35 72.4,37 ; 71.5,28.2 72.15,27.55 LS_2.6@73.024,27.55 LS_2.3@75.776,27.55 76.85,27.55 77.3,28 ; 75.25,51.1 LS_4.6@75.25,52.624 LS_4.3@75.25,55.376 ; 76.9,44 77.45,44.55 LS_3.6@77.45,45.524 LS_3.3@77.45,48.276
  Top Layer w0.5: CLK_BUFFER.5@12.2,88.595 12.105,88.69 12.105,89.495 11.5,90.1 10.2,90.1 9.3,89.2 9.3,82 9.9,81.4 10,81.4 ; v2(13.9,78.7) 11.6,78.7 10,80.3 10,81.4 ; OSCILLATOR_20MHz.1@16.63,80.675 OSCILLATOR_20MHz.4@16.63,82.325 16.58,82.275 C_BYPASS1.2@13.1,82.275 10.875,82.275 10,81.4 ; C_1p8V_Siwa.2@34.475,46.7 34.485,46.69 36.93,46.69 Siwa_receiver_1.5@36.94,46.68 ; Siwa_receiver_3.4@47.71,60.01 Siwa_receiver_3.4@47.72,60 ; Siwa_receiver_2.5@50.26,35.9 50.28,35.88 50.28,33.095 C2_1p8V_Siwa.2@50.3,33.075 ; Siwa_receiver_4.2@61.04,54.3 61.053,54.312 63.987,54.312 C4_1p8V_Siwa.1@64,54.325
  Bottom Layer w0.45: v1(69.5,29) v1(77.4,29)
  Bottom Layer w0.5: Power_header.6@13.34,65.34 17.84,65.34 20.517,68.017 ; v2(13.9,78.7) 15.2,77.4 15.2,73.4 20.5,68.1 28.211,68.1 30.5,65.811 v2(30.5,65.8)
  other v1: 45,24.8 61.1,29.2 77.5,34 74.7,44 74.7,49.9
  other v2: 49.6,55.7
  other v3: 37.9,22.2
  other v4: 73.3,37